# Allegro board AC7A035.brd
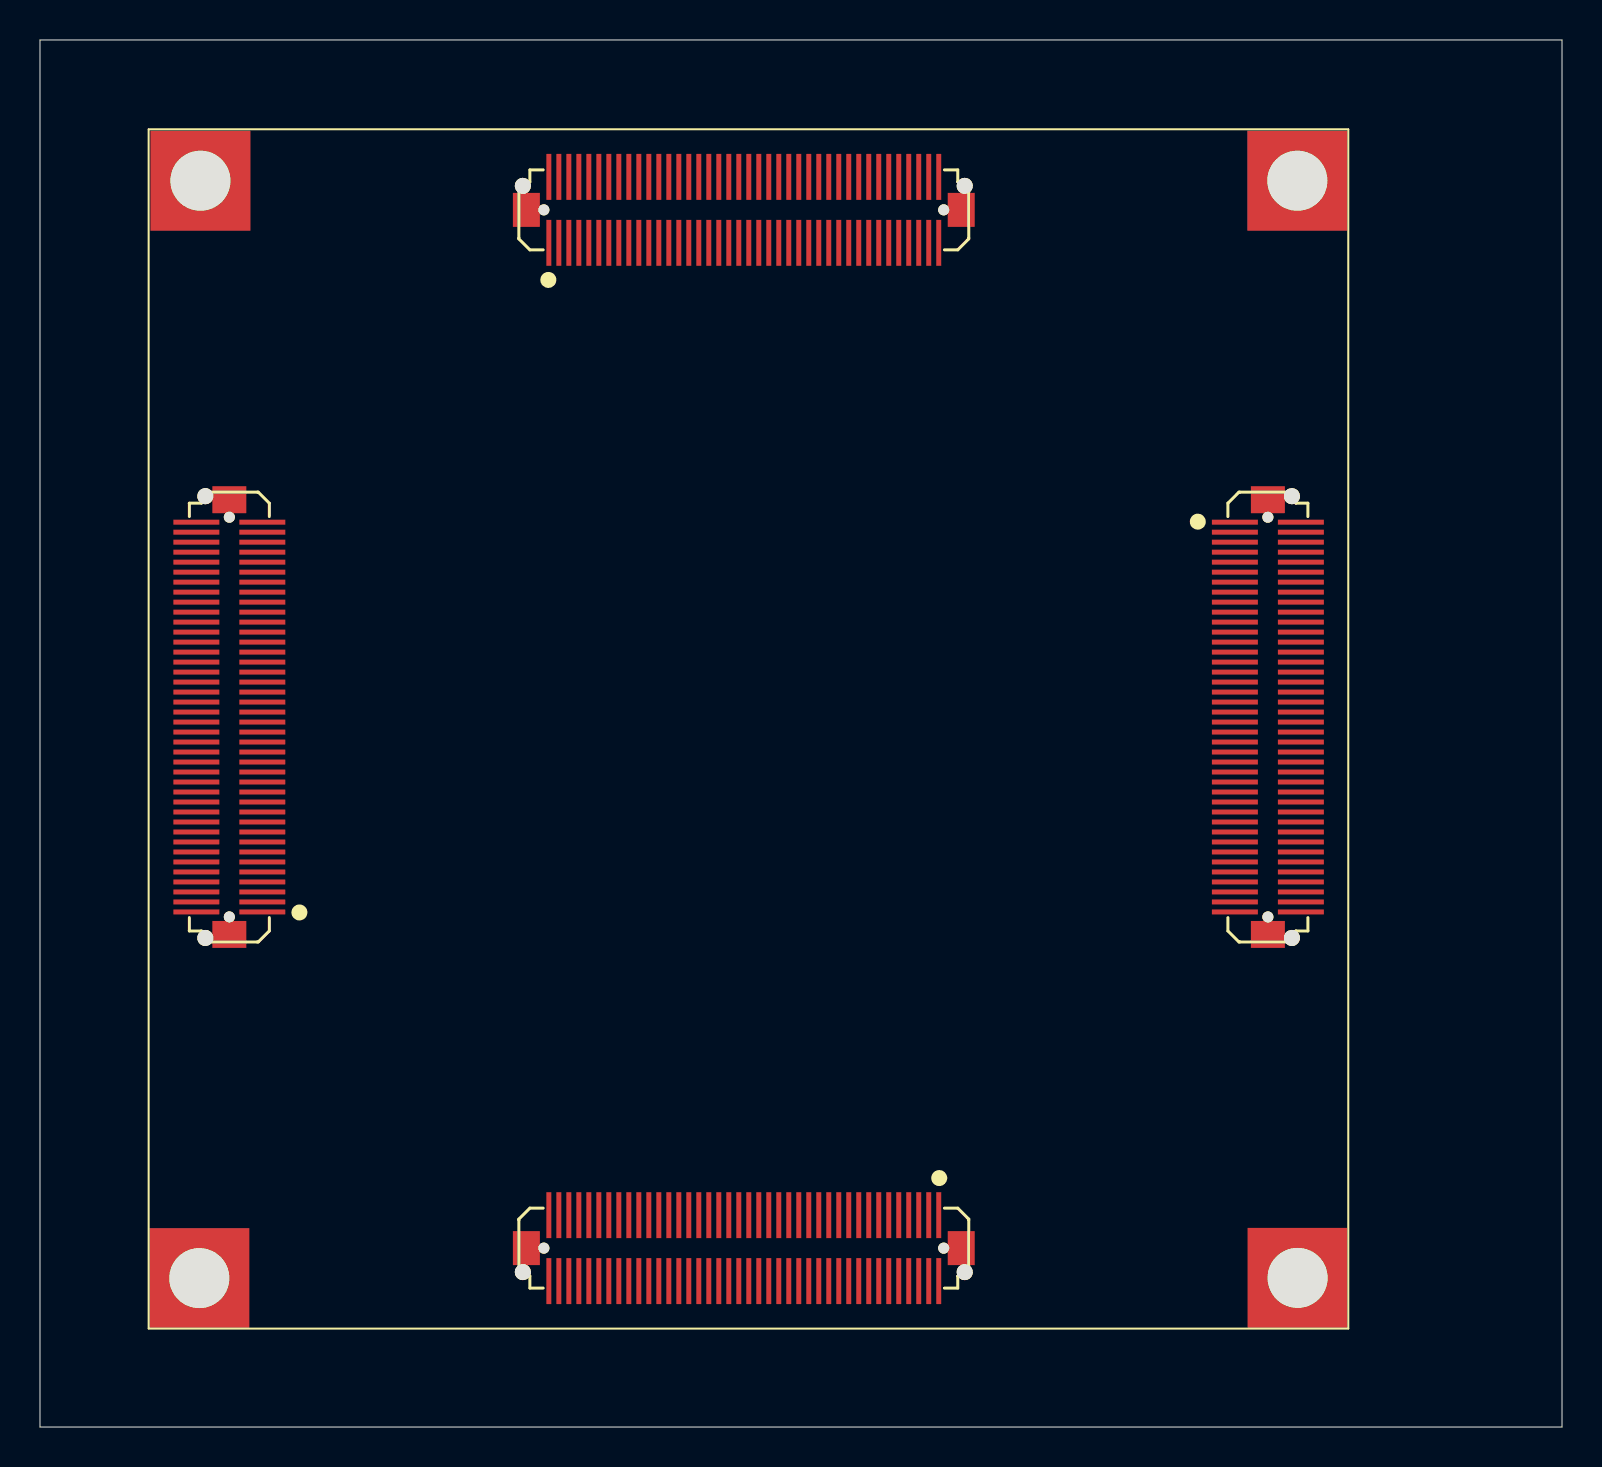
[diagram p0: board, top side]
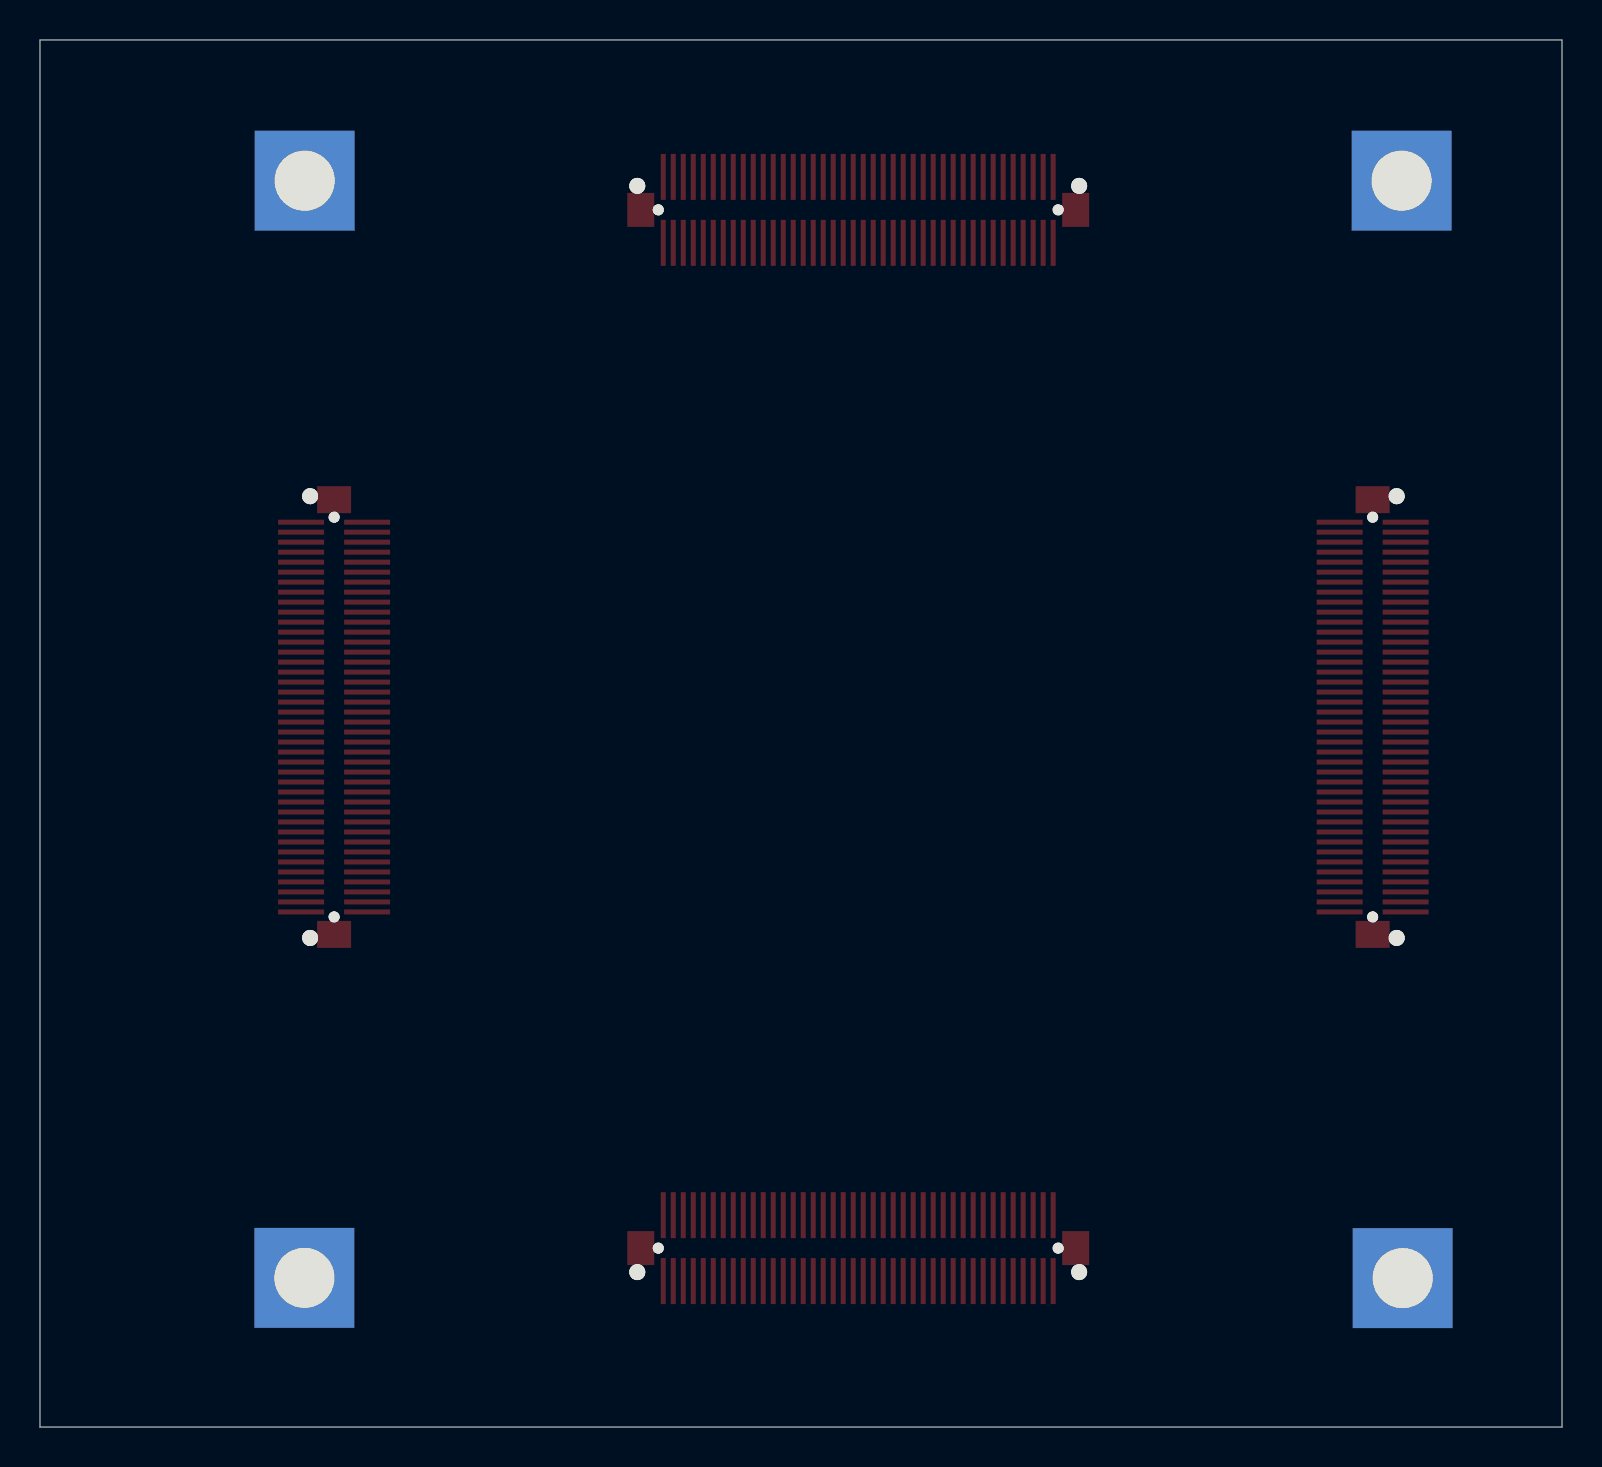
[diagram p1: board, bottom side, seen from below]

Outline 76.12 x 69.39 mm; copper layers: TOP, L2_GND, L3, L4_VCC, L5_GND, BOTTOM. Coordinates in mm from the lower left corner of the outline.
Outline path: 0,69.39 0,0 76.12,0 76.12,69.39 0,69.39

## Design rules (mm)
net group EX_IO2_15N: nets EX_IO2_15N IO2_15N
net group EX_IO2_15P: nets EX_IO2_15P IO2_15P
net group EX_IO2_16N: nets EX_IO2_16N IO2_16N
net group EX_IO2_16P: nets EX_IO2_16P IO2_16P
net group N16786323: nets N16786264 N16786323
net group PCIE_CLK_N: nets N17087016 PCIE_CLK_N
net group PCIE_CLK_P: nets N17087018 PCIE_CLK_P
net group PCIE_TX0_N: nets N17086969 PCIE_TX0_N
net group PCIE_TX0_P: nets N17086971 PCIE_TX0_P
net group PCIE_TX1_N: nets N17086973 PCIE_TX1_N
net group PCIE_TX1_P: nets N17086975 PCIE_TX1_P
net group PHY_MDI0_N: nets PHY_MDI0_N PHY_MDI0_P
net group PHY_MDI1_N: nets PHY_MDI1_N PHY_MDI1_P
net group PHY_MDI2_P: nets PHY_MDI2_N PHY_MDI2_P
net group PHY_MDI3_N: nets PHY_MDI3_N PHY_MDI3_P
net group SFP1_RX_P: nets SFP1_RX_N SFP1_RX_P
net group SFP1_TX_P: nets SFP1_TX_N SFP1_TX_P
net group SFP2_RX_P: nets SFP2_RX_N SFP2_RX_P
net group SFP2_TX_P: nets SFP2_TX_N SFP2_TX_P
net group XADC-DIFF: nets XADC_VN XADC_VP
net group 9134: nets 9134_CLK 9134_D0 9134_D1 9134_D2 9134_D3 9134_D4 9134_D5 9134_D6 9134_D7 9134_D8 9134_D9 9134_D10 9134_D11 9134_D12 9134_D13 9134_D14 9134_D15 9134_D16 9134_D17 9134_D18 9134_D19 9134_D20 9134_D21 9134_D22 9134_D23 9134_DE 9134_HS 9134_VS
net group ETH_RX: nets ETH_RXCK ETH_RXCTL ETH_RXD0 ETH_RXD1 ETH_RXD2 ETH_RXD3
net group ETH_TX: nets ETH_TXCK ETH_TXCTL ETH_TXD0 ETH_TXD1 ETH_TXD2 ETH_TXD3
net group HDMI: nets RX_0N RX_0P RX_1N RX_1P RX_2N RX_2P RX_CN RX_CP TX_0N TX_0P TX_1N TX_1P TX_2N TX_2P TX_CN TX_CP
net group J11-DIFF: nets EX_IO1_1N EX_IO1_1P EX_IO1_2N EX_IO1_2P EX_IO1_3N EX_IO1_3P EX_IO1_4N EX_IO1_4P EX_IO1_5N EX_IO1_5P EX_IO1_6N EX_IO1_6P EX_IO1_7N EX_IO1_7P EX_IO1_8N EX_IO1_8P EX_IO1_9N EX_IO1_9P EX_IO1_10N EX_IO1_10P EX_IO1_11N EX_IO1_11P EX_IO1_12N EX_IO1_12P EX_IO1_13N EX_IO1_13P EX_IO1_14N EX_IO1_14P EX_IO1_15N EX_IO1_15P EX_IO1_16N EX_IO1_16P EX_IO1_17N EX_IO1_17P IO1_1N IO1_1P IO1_2N IO1_2P IO1_3N IO1_3P IO1_4N IO1_4P IO1_5N IO1_5P IO1_6N IO1_6P IO1_7N IO1_7P IO1_8N IO1_8P IO1_9N IO1_9P IO1_10N IO1_10P IO1_11N IO1_11P IO1_12N IO1_12P IO1_13N IO1_13P IO1_14N IO1_14P IO1_15N IO1_15P IO1_16N IO1_16P IO1_17N IO1_17P
net group J13-DIFF: nets EX_IO2_1N EX_IO2_1P EX_IO2_2N EX_IO2_2P EX_IO2_3N EX_IO2_3P EX_IO2_4N EX_IO2_4P EX_IO2_5N EX_IO2_5P EX_IO2_6N EX_IO2_6P EX_IO2_7N EX_IO2_7P EX_IO2_8N EX_IO2_8P EX_IO2_9N EX_IO2_9P EX_IO2_10N EX_IO2_10P EX_IO2_11N EX_IO2_11P EX_IO2_12N EX_IO2_12P EX_IO2_13N EX_IO2_13P EX_IO2_14N EX_IO2_14P EX_IO2_17N EX_IO2_17P IO2_11N IO2_11P IO2_12N IO2_12P IO2_13N IO2_13P IO2_14N IO2_14P IO2_17N IO2_17P
net group J13-DIFF-1: nets IO2_1N IO2_1P IO2_2N IO2_2P IO2_3N IO2_3P IO2_4N IO2_4P IO2_5N IO2_5P IO2_6N IO2_6P IO2_7N IO2_7P IO2_8N IO2_8P IO2_9N IO2_9P IO2_10N IO2_10P
net group P1-DIFF: nets PCIE_RX0_N PCIE_RX0_P PCIE_RX1_N PCIE_RX1_P
nets with their own width: min track width 0.102; nets GND

## Placement (name value [footprint] x y rotation side)
CON1  -  [AXK680337YG]  61.41 35.52 270 top
CON2  -  [AXK680337YG]  35.2 60.89 0 top
CON3  -  [AXK680337YG]  9.47 35.52 90 top
CON4  -  [AXK680337YG]  35.2 8.95 180 top
NOREF  -  [unnamed]  8.03 62.35 0 top
NOREF#2  -  [unnamed]  7.97 7.45 0 top
NOREF#3  -  [unnamed]  62.89 62.35 0 top
NOREF#4  -  [#2]  -56.01 82.02 0 top
NOREF#5  -  [#2]  249.88 34.55 0 top
NOREF#6  -  [unnamed]  62.9 7.46 0 top
NOREF#7  -  [#2]  -55.96 -22.05 90 top

## Library data of the parts
CON1-CON4 = CON40X2_0_2

## Footprints (pads in the part's own frame, mm; a bottom-side part is the same pattern mirrored in y, then rotated)
AXK680337YG
  round 0.8 hole 0.8 unplated: (-11.05,1.2) (11.05,1.2)
  round 0.55 hole 0.55 unplated: (-10,0) (10,0)
  rect 0.25x2.3 smd: 1(-9.75,-1.649) 2(-9.75,1.649) 3(-9.25,-1.649) 4(-9.25,1.649) 5(-8.75,-1.649) 6(-8.75,1.649) 7(-8.25,-1.649) 8(-8.25,1.649) 9(-7.75,-1.649) 10(-7.75,1.649) 11(-7.25,-1.649) 12(-7.25,1.649) 13(-6.75,-1.649) 14(-6.75,1.649) 15(-6.25,-1.649) 16(-6.25,1.649) 17(-5.75,-1.649) 18(-5.75,1.649) 19(-5.25,-1.649) 20(-5.25,1.649) 21(-4.75,-1.649) 22(-4.75,1.649) 23(-4.25,-1.649) 24(-4.25,1.649) 25(-3.75,-1.649) 26(-3.75,1.649) 27(-3.25,-1.649) 28(-3.25,1.649) 29(-2.75,-1.649) 30(-2.75,1.649) 31(-2.25,-1.649) 32(-2.25,1.649) 33(-1.75,-1.649) 34(-1.75,1.649) 35(-1.25,-1.649) 36(-1.25,1.649) 37(-0.75,-1.649) 38(-0.75,1.649) 39(-0.25,-1.649) 40(-0.25,1.649) 41(0.25,-1.649) 42(0.25,1.649) 43(0.75,-1.649) 44(0.75,1.649) 45(1.25,-1.649) 46(1.25,1.649) 47(1.75,-1.649) 48(1.75,1.649) 49(2.25,-1.649) 50(2.25,1.649) 51(2.75,-1.649) 52(2.75,1.649) 53(3.25,-1.649) 54(3.25,1.649) 55(3.75,-1.649) 56(3.75,1.649) 57(4.25,-1.649) 58(4.25,1.649) 59(4.75,-1.649) 60(4.75,1.649) 61(5.25,-1.649) 62(5.25,1.649) 63(5.75,-1.649) 64(5.75,1.649) 65(6.25,-1.649) 66(6.25,1.649) 67(6.75,-1.649) 68(6.75,1.649) 69(7.25,-1.649) 70(7.25,1.649) 71(7.75,-1.649) 72(7.75,1.649) 73(8.25,-1.649) 74(8.25,1.649) 75(8.75,-1.649) 76(8.75,1.649) 77(9.25,-1.649) 78(9.25,1.649) 79(9.75,-1.649) 80(9.75,1.649)
  rect 1.35x1.7 smd: 81(-10.875,0) 84(10.875,0)
unnamed
  rect 5x5 hole 3: 1(0,0)

## Nets
+5.0V: CON1.1 CON1.2 CON1.3 CON1.4 CON1.5 CON1.6 CON1.7 CON1.8
GND: CON1.9 CON1.10 CON1.19 CON1.20 CON1.29 CON1.30 CON1.39 CON1.40 CON1.49 CON1.50 CON1.59 CON1.60 CON1.69 CON1.70 CON2.9 CON2.10 CON2.19 CON2.20 CON2.29 CON2.30 CON2.39 CON2.40 CON2.49 CON2.50 CON2.59 CON2.60 CON2.69 CON2.70 CON3.9 CON3.10 CON3.19 CON3.20 CON3.29 CON3.30 CON3.39 CON3.40 CON3.49 CON3.50 CON3.59 CON3.60 CON3.69 CON3.70 CON4.9 CON4.10 CON4.15 CON4.16 CON4.21 CON4.22 CON4.27 CON4.28 CON4.33 CON4.34 CON4.39 CON4.40 CON4.49 CON4.50 CON4.59 CON4.60 CON4.69 CON4.70
9013_CLK: CON3.54
9013_D0: CON3.64
9013_D1: CON3.62
9013_D2: CON3.58
9013_D3: CON3.56
9013_D4: CON3.52
9013_D5: CON3.48
9013_D6: CON3.46
9013_D7: CON3.44
9013_D8: CON3.42
9013_D9: CON3.38
9013_D10: CON3.36
9013_D11: CON3.34
9013_D12: CON3.32
9013_D13: CON3.28
9013_D14: CON3.26
9013_D15: CON3.2
9013_D16: CON3.1
9013_D17: CON3.5
9013_D18: CON3.7
9013_D19: CON3.11
9013_D20: CON3.13
9013_D21: CON3.15
9013_D22: CON3.17
9013_D23: CON3.21
9013_DE: CON3.66
9013_HS: CON3.68
9013_NRESET: CON3.23
9013_VS: CON3.72
9134_CLK: CON2.48
9134_D0: CON2.62
9134_D1: CON2.58
9134_D2: CON2.56
9134_D3: CON2.54
9134_D4: CON2.52
9134_D5: CON2.46
9134_D6: CON2.44
9134_D7: CON2.42
9134_D8: CON2.38
9134_D9: CON2.36
9134_D10: CON2.32
9134_D11: CON2.28
9134_D12: CON2.26
9134_D13: CON2.24
9134_D14: CON2.22
9134_D15: CON2.18
9134_D16: CON2.16
9134_D17: CON2.14
9134_D18: CON2.12
9134_D19: CON2.4
9134_D20: CON2.2
9134_D21: CON2.41
9134_D22: CON2.43
9134_D23: CON2.45
9134_DE: CON2.64
9134_HS: CON2.66
9134_NRESET: CON2.34
9134_VS: CON2.68
ETH_MDC: CON2.76
ETH_MDIO: CON2.74
ETH_RESET: CON2.72
ETH_RXCK: CON2.47
ETH_RXCTL: CON2.51
ETH_RXD0: CON2.53
ETH_RXD1: CON2.55
ETH_RXD2: CON2.57
ETH_RXD3: CON2.65
ETH_TXCK: CON2.71
ETH_TXCTL: CON2.67
ETH_TXD0: CON2.78
ETH_TXD1: CON2.77
ETH_TXD2: CON2.75
ETH_TXD3: CON2.73
FAN_PWM: CON1.77
FPGA_TCK: CON3.77
FPGA_TDI: CON3.78
FPGA_TDO: CON3.79
FPGA_TMS: CON3.80
HDMI_SCL: CON3.27
HDMI_SDA: CON3.25
I2C_SCL: CON3.71
I2C_SDA: CON3.73
IO1_1N: CON3.22
IO1_1P: CON3.24
IO1_2N: CON4.76
IO1_2P: CON4.78
IO1_3N: CON4.72
IO1_3P: CON4.74
IO1_4N: CON4.75
IO1_4P: CON4.77
IO1_5N: CON4.71
IO1_5P: CON4.73
IO1_6N: CON4.66
IO1_6P: CON4.68
IO1_7N: CON4.65
IO1_7P: CON4.67
IO1_8N: CON4.62
IO1_8P: CON4.64
IO1_9N: CON4.61
IO1_9P: CON4.63
IO1_10N: CON4.55
IO1_10P: CON4.57
IO1_11N: CON4.56
IO1_11P: CON4.58
IO1_12N: CON4.51
IO1_12P: CON4.53
IO1_13N: CON4.45
IO1_13P: CON4.47
IO1_14N: CON4.52
IO1_14P: CON4.54
IO1_15N: CON4.41
IO1_15P: CON4.43
IO1_16N: CON4.46
IO1_16P: CON4.48
IO1_17N: CON4.42
IO1_17P: CON4.44
IO2_1N: CON2.3
IO2_1P: CON2.1
IO2_2N: CON2.7
IO2_2P: CON2.5
IO2_3N: CON2.8
IO2_3P: CON2.6
IO2_4N: CON2.13
IO2_4P: CON2.11
IO2_5N: CON2.17
IO2_5P: CON2.15
IO2_6N: CON2.23
IO2_6P: CON2.21
IO2_7N: CON2.27
IO2_7P: CON2.25
IO2_8N: CON2.33
IO2_8P: CON2.31
IO2_9N: CON2.37
IO2_9P: CON2.35
IO2_10N: CON2.63
IO2_10P: CON2.61
IO2_11N: CON1.31
IO2_11P: CON1.33
IO2_12N: CON1.25
IO2_12P: CON1.27
IO2_13N: CON1.21
IO2_13P: CON1.23
IO2_14N: CON1.32
IO2_14P: CON1.34
IO2_15N: CON1.22
IO2_15P: CON1.24
IO2_16N: CON1.26
IO2_16P: CON1.28
IO2_17N: CON1.16
IO2_17P: CON1.18
KEY1: CON3.51
KEY2: CON3.53
KEY3: CON3.55
KEY4: CON3.57
LED1: CON3.47
LED2: CON3.45
LED3: CON3.43
LED4: CON3.41
PCIE_CLK_N: CON4.38
PCIE_CLK_P: CON4.36
PCIE_PERST: CON3.61
PCIE_RX0_N: CON4.25
PCIE_RX0_P: CON4.23
PCIE_RX1_N: CON4.20
PCIE_RX1_P: CON4.18
PCIE_TX0_N: CON4.19
PCIE_TX0_P: CON4.17
PCIE_TX1_N: CON4.14
PCIE_TX1_P: CON4.12
RESET: CON3.3
SD_CD_N: CON1.75
SD_CLK: CON1.67
SD_CMD: CON1.65
SD_DAT0: CON1.71
SD_DAT1: CON1.73
SD_DAT2: CON1.61
SD_DAT3: CON1.63
SFP1_IIC_SCL: CON3.12
SFP1_IIC_SDA: CON3.14
SFP1_LOSS: CON3.33
SFP1_RX_N: CON4.32
SFP1_RX_P: CON4.30
SFP1_TX_DIS: CON3.31
SFP1_TX_N: CON4.26
SFP1_TX_P: CON4.24
SFP2_IIC_SCL: CON3.16
SFP2_IIC_SDA: CON3.18
SFP2_LOSS: CON3.37
SFP2_RX_N: CON4.37
SFP2_RX_P: CON4.35
SFP2_TX_DIS: CON3.35
SFP2_TX_N: CON4.31
SFP2_TX_P: CON4.29
UART1_RXD: CON3.65
UART1_TXD: CON3.67
XADC_VN: CON1.51
XADC_VP: CON1.53
N16942674: CON3.4
N16942692: CON3.6
N16942694: CON3.8
N16943156: CON1.37
N16943158: CON1.45
N16943160: CON1.47
N16943192: CON1.43
N16943194: CON1.41
N16943509: CON1.58
N16943511: CON1.56
N16943514: CON1.46
N16943516: CON1.48
N16943518: CON1.36
N16943520: CON1.38
N16943530: CON1.44
N16943532: CON1.42
N16943534: CON1.54
N16943647: CON2.80
N16943695: CON2.79
N16943815: CON3.63
N16943892: CON3.74
N16944663: CON1.35

Pads without a net: CON1 11 12 13 14 15 17 52 55 57 62 64 66 68 72 74 76 78 79 80 81 84; CON2 81 84; CON3 75 76 81 84; CON4 1 2 3 4 5 6 7 8 11 13 79 80 81 84; NOREF 1; NOREF#2 1; NOREF#3 1; NOREF#6 1

## Text on the board
User.11: 10.CONTROLLED IMPENDANCE 50 OHM +/-10% | 6.TOLERANCE: HOLES DIAMETER {NPTH} +/-0.003" | 7.LINE WIDTH/SPACING: +/-20% | 8.ALL VIAS ARE TENTED | 9.CONTROLLED DIFFERENTAIL IMPEDANCE 100 OHM +/-10% | {EDGE TO EDGE/CENTRE TO EDGE} +/-0.005" | LINE WITH IMPEDANCE CHART FOR REFERENCE | HOLES {CENTRE TO CENTRE} +/-0.003" | OUTLINE {DATUM TO HOLES} +/-0.003" | L1 | L2 | L3 | L4 | L5 | L6 | (GND) | {DATUM TO EDGE} +/-0.005" | LAYER 1      L1 TOP | LAYER 2      L2 GND | LAYER 3      L3 INNER | LAYER 4      L4 INNER | LAYER 5      L5 GND | LAYER 6      L6 BOTTOM | SINGLE ENDED | 50ohm | WIDTH | GOLD 0.05um MINIMUM | 4.5mil | 4mil | TOP SIDE | {PTH} +/-0.003" | (WIDTH/SPACE) | 3.5mil/6mil | DIFF-PAIR | 4mil/7mil | 100ohm | 6.1mil/4.9mil | 90ohm | 0.333oz | 1oz
User.45: FIGURE | SIZE | 8.0 | 12.0 | 35.0 | 35.04 | 36.0 | 39.37 | 40.0 | 42.0 | 51.18 | 62.0 | 70.87 | 71.0 | 118.11 | 125.0 | 21.66 | 31.5 | 129.92 | 55.12x31.5 | 62.0x39.37 | 94.49x31.5 | 102.36x31.5 | DRILL CHART | ALL UNITS ARE IN MILS | TOLERANCE | +3.0/-3.0 | PLATED | NON-PLATED | QTY | 281 | 500 | 80 | 10 | 2 | 6 | 12 | 4 | 8 | 1
